# Altium PCB main.PcbDoc
Units mil, origin at the board's own origin, x right, y up, seen from the top; angles counter-clockwise.
Board outline 6000 x 4000 mil, 2 copper layers (Top Layer, Bottom Layer); 30 components, 40 nets, 196 pads, 9 vias.
Unrouted connection lines stored in the file: 23.
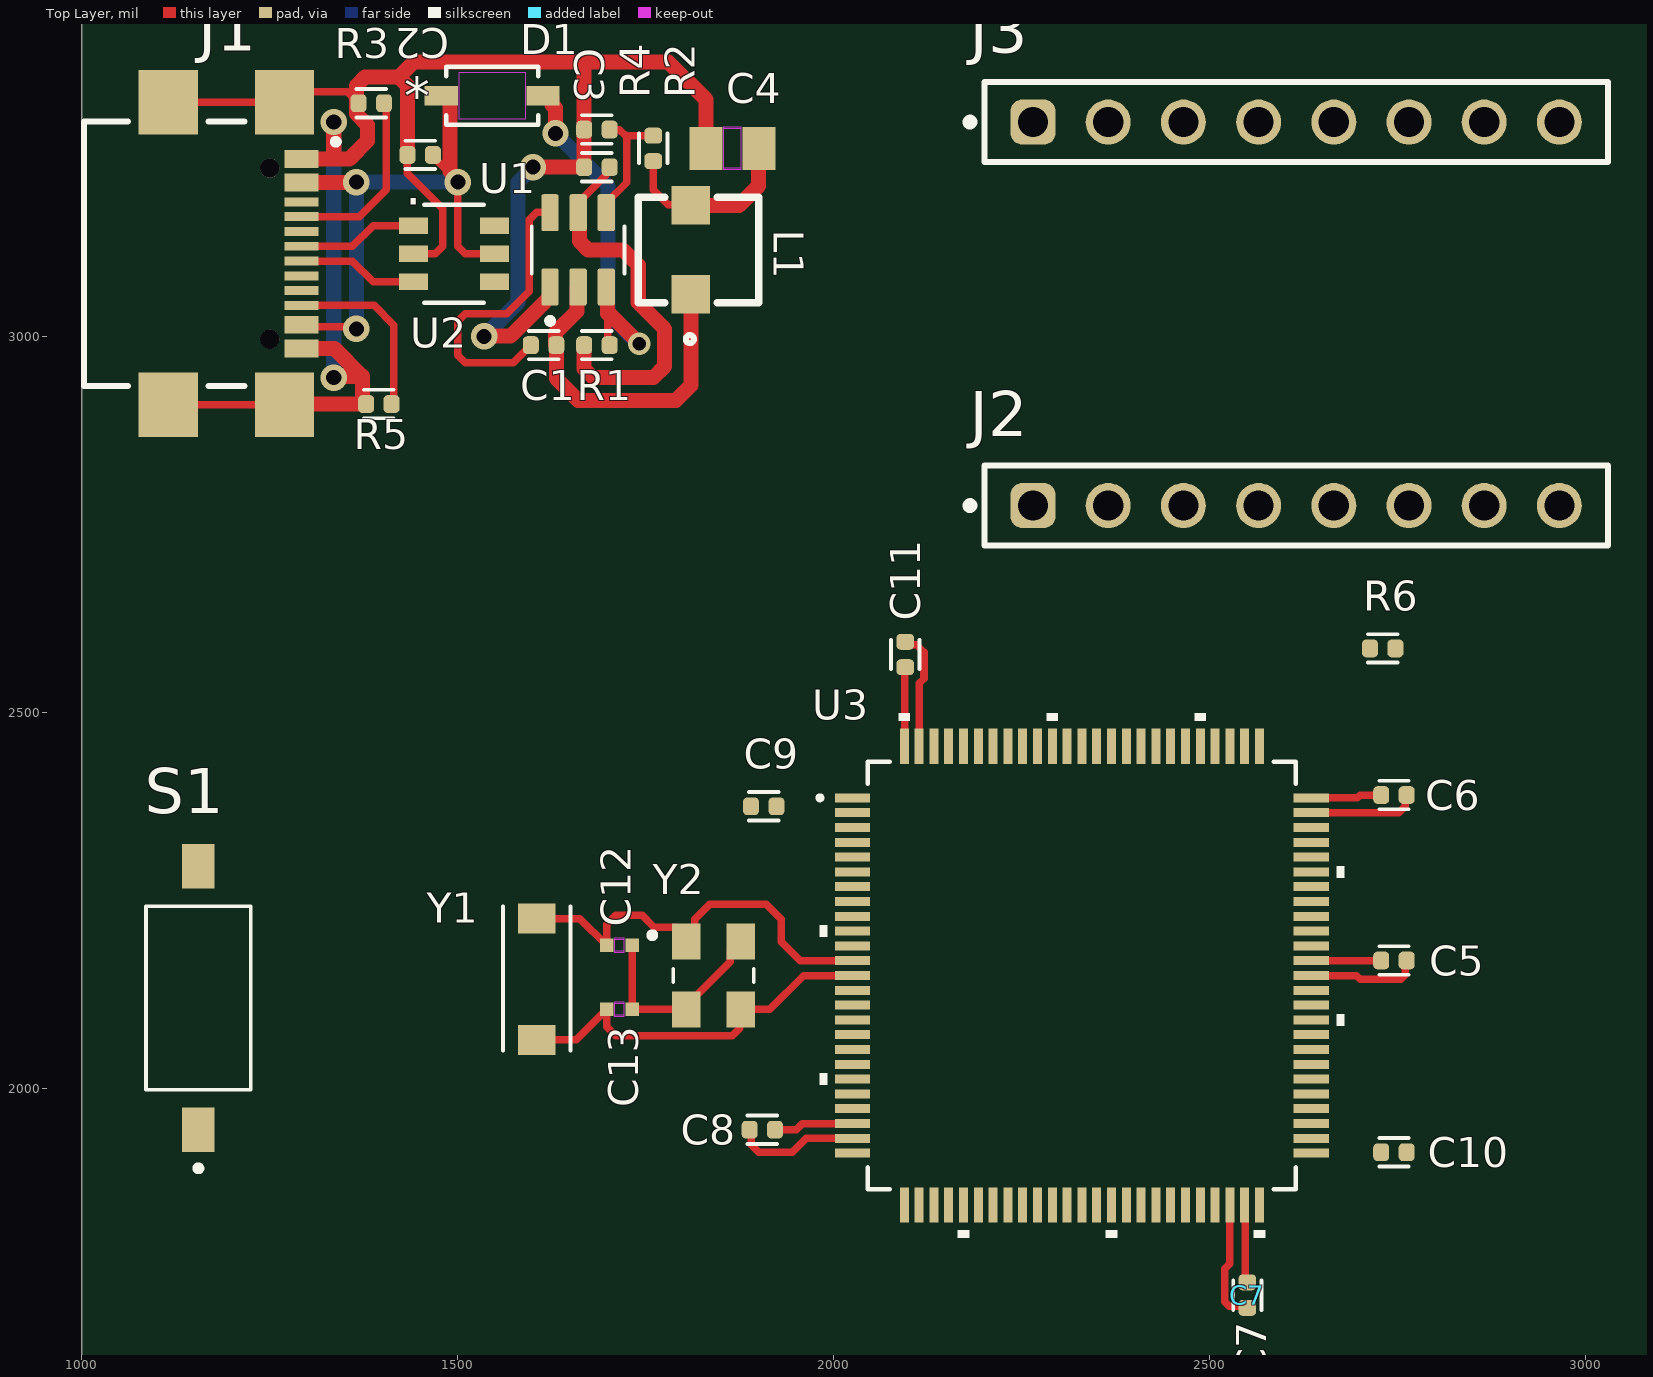
[diagram p0: Top Layer view]
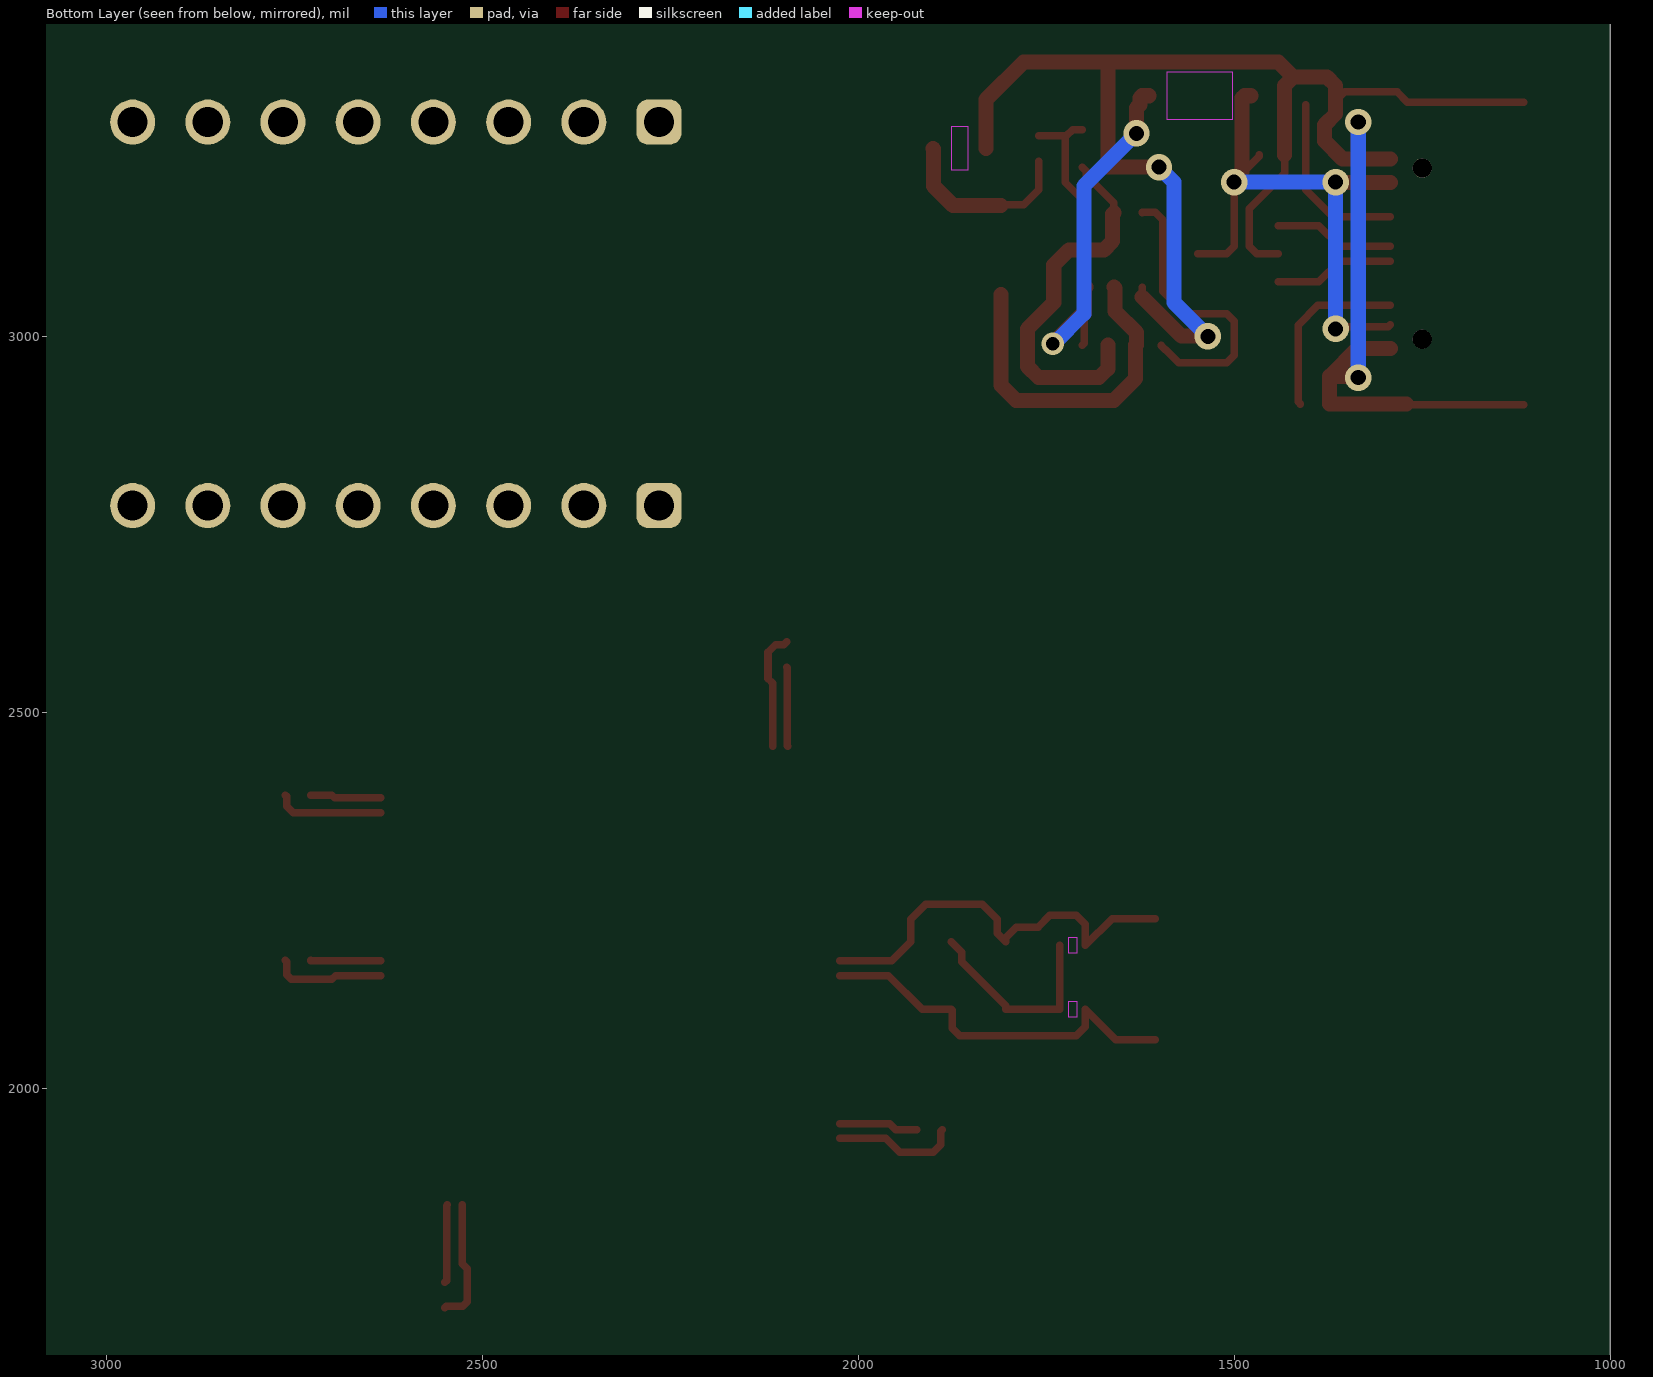
[diagram p1: Bottom Layer view, seen from below]
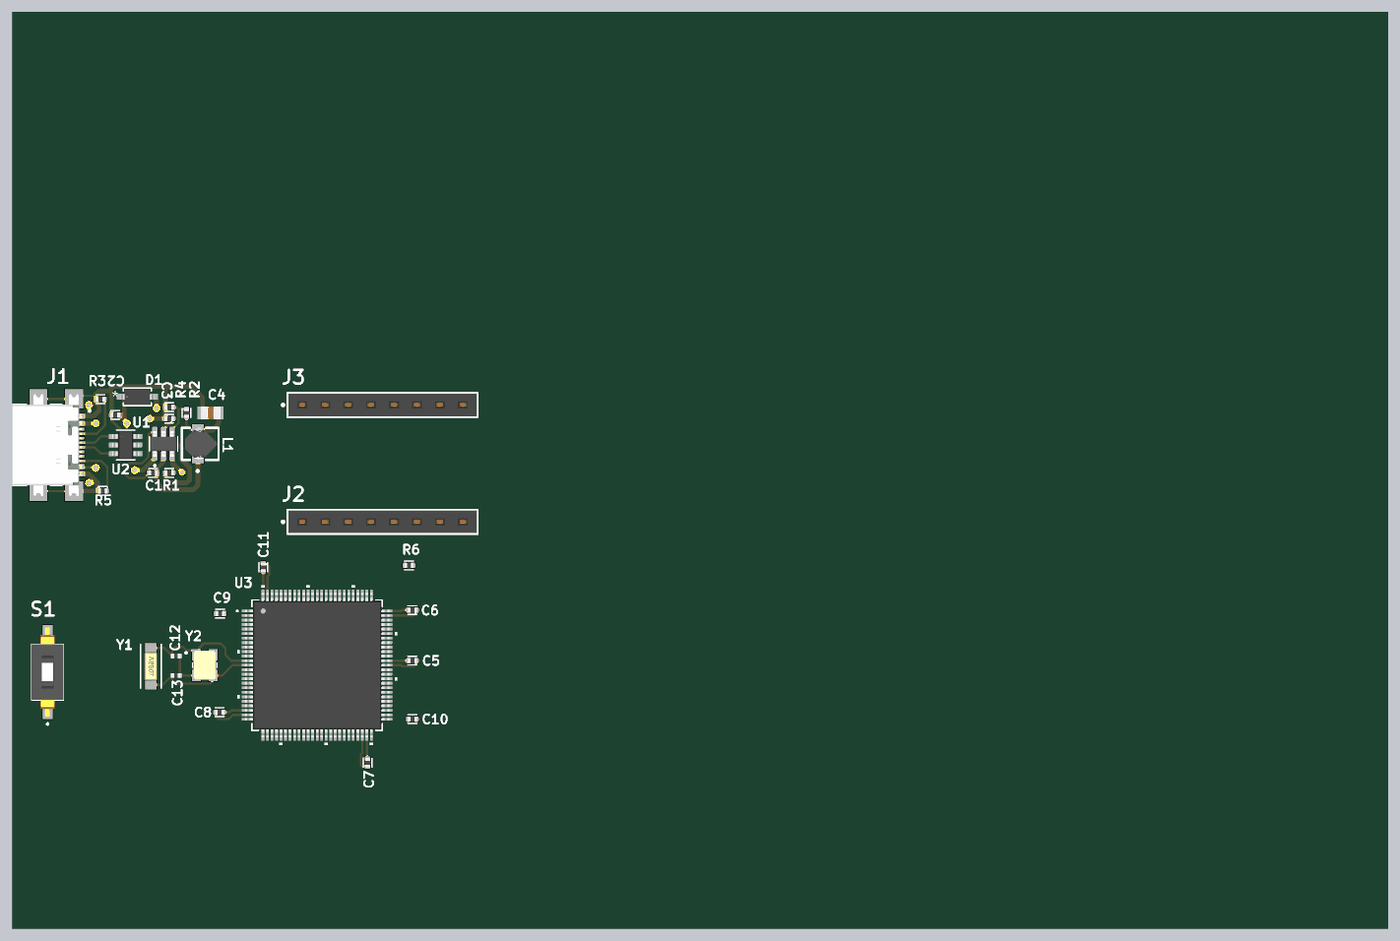
[diagram p2: 3D render of the assembled board from above, using the file's embedded part models]

## Layer stack, top to bottom
Top Solder: solder mask 0.4, Solder Resist, Dk 3.5
Top Layer: signal copper 1.4
Dielectric 1: dielectric 12.6, FR-4, Dk 4.8
Bottom Layer: signal copper 1.4
Bottom Solder: solder mask 0.4, Solder Resist, Dk 3.5

## Board outline
1000,1000 7000,1000 7000,5000 1000,5000

## Design rules (kind name [scope] priority, off if disabled: settings)
Clearance [All] p1: gap=2 ignorepadtopadclearanceinfootprint=FALSE except(0: Arc-Hole Track-Hole SMDPad-Hole THPad-Hole Via-Hole Fill-Hole Poly-Hole Region-Hole Text-Hole)
ComponentClearance [All] p1: gap=2 collisioncheckmode=3 verticalgap=2 showdistances=FALSE
DiffPairsRouting [All] p1: maxlimit=10 minlimit=10 mostfreqgap=10 toplayer_minwidth=15 toplayer_maxwidth=15 toplayer_prefwidth=15 bottomlayer_minwidth=15 bottomlayer_maxwidth=15 bottomlayer_prefwidth=15 maxuncoupledlength=500
PolygonConnect [All] p1: connectstyle=Relief reliefconductorwidth=10 reliefentries=4 polygonreliefangle="90 Angle" airgapwidth=10
RoutingVias [All] p1: holewidth=18 width=30 viastyle="Through Hole" minholewidth=8 minwidth=15 maxholewidth=28 maxwidth=50
SolderMaskExpansion [All] p1: expansion=4 istentingtop=FALSE
Width [All] p1: maxlimit=20 minlimit=1 preferedwidth=10 minimp=50.000000 maximp=50.000000 favimp=50.000000
28 further rules are at their usual default settings.

## Classes and differential pairs
differential pair USBD: +USBD_P -USBD_N

## Components (designator, comment, footprint, x,y, rotation, side; value= is the part's Value field where it differs from the comment)
C1 "104" CAPC1005X55N2 1614.09,2988.38 r180 top
C2 "104" CAPC1005X55N2 1450,3241.31 r0 top
C3 "104" CAPC1005X55N2 1685,3225 r180 top
C4 "22uF" CAP_CC0805_YAG 1865.31,3250 r0 top
C5 "104" CAPC1005X55N2 2745,2170 r0 top
C6 "104" CAPC1005X55N2 2745,2390 r0 top
C7 "104" CAPC1005X55N2 2550,1725 r270 top
C8 "104" CAPC1005X55N2 1905,1945 r0 top
C9 "104" CAPC1005X55N2 1906.93,2375 r0 top
C10 "104" CAPC1005X55N2 2745,1915 r0 top
C11 "104" CAPC1005X55N2 2095,2576.93 r90 top
C12 "15pF" CC0402N_YAG-L 1715,2190 r180 top
C13 "15pF" CC0402N_YAG-L 1715,2105 r180 top
D1 "1N5819" 1N5819HW-7-F_DIO 1545.75,3320 r0 top
J1 "USB-C" GCT_USB4110GFA 1250,3110 r270 top
J2 "HEADER_8_FEM" HEADER_8_FEM 2615,2775 r0 top
J3 "HEADER_8_FEM" HEADER_8_FEM 2615,3285 r0 top
L1 "2.2uH" CDRH2D14 1810,3115 r90 top
R1 "10K" RC0402 1685,2988.38 r0 top
R2 "15K" RC0402 1760,3250 r90 top
R3 "5K1" RC0402 1385,3310 r180 top
R4 "4K7" RC0402 1685,3275 r180 top
R5 "5K1" RC0402 1395,2910 r180 top
R6 "10k" RC0402 2730,2585 r0 top
S1 "SW" SW_DS04-254-2-01BK-SMT 1155,2120 r90 top
U1 "TPS563201DDCR" SOT95P280X110-6N 1660,3115 r90 top
U2 "USBLC6" SOT23-6L_STM 1495,3110 r0 top
U3 "STM32G474VET6TR" STM32G474VET6TR 2330,2150 r0 top
Y1 "16MHz" ABM3-16.000MHZ-D2Y-T 1605,2145 r270 top
Y2 "Xtal" OSCCC320X250X60N 1840,2150 r0 top

## Footprints (in the part's own frame and the unit in brackets; to place one, negate y for a bottom-side part, rotate by r counter-clockwise, add the part's x,y. Pads: shape width x height; smd on the part's side, far side on the other; paste and mask are expansions set on the pad)
1N5819HW-7-F_DIO [mil]
  rect 44x26 smd paste+0 mask+0: 1(-67.79,0) 2(67.79,0)
  Keep-Out Layer region: -43.79,-31.5 -43.79,31.5 43.79,31.5 43.79,-31.5
  silkscreen extent -61,-38 61,38, body extent -76,-34 76,34, height 53
ABM3-16.000MHZ-D2Y-T [mil]
  rect 40x50 smd: 1(-80.71,0) 2(80.71,0)
  silkscreen extent -97,-45 95,45, body extent -63,-30 63,30, height 35
CAP_CC0805_YAG [mil]
  rect 44x57 smd paste+0 mask+0: 1(-35.31,0) 2(35.31,0)
  Top Layer keep-out region: -11.31,-26.5 -11.31,26.5 11.31,26.5 11.31,-26.5
  Keep-Out Layer region: -11.31,-28.5 -11.31,28.5 11.31,28.5 11.31,-28.5
  body extent -43,-29 43,29, height 57
CAPC1005X55N2 [mm]
  rrect53% 0.54x0.6 smd: 1(-0.43,0) 2(0.43,0)
  silkscreen extent -0.5,-0.48 0.5,0.48, body extent -0.52,-0.28 0.52,0.28, height 0.56
CC0402N_YAG-L [mil]
  rect 18x18 smd paste+0 mask+0: 1(-17,0.03) 2(17,0.03)
  Top Layer keep-out region: -6,-7.97 -6,8.03 6,8.03 6,-7.97
  Keep-Out Layer region: -6,-9.97 -6,10.03 6,10.03 6,-9.97
  body extent -20,-10 20,10, height 28
CDRH2D14 [mil]
  rect 51.18x51.18 smd: 1(-59.06,0) 2(59.06,0)
  silkscreen extent -124,-90 70,70, body extent -70,-84 70,56, height 61
GCT_USB4110GFA [mm]
  rect 0.6x1.15 smd: A1/B12(-3.2,1.075) A4/B9(-2.4,1.075) B1/A12(3.2,1.075) B4/A9(2.4,1.075)
  rect 0.3x1.15 smd: A5(-1.25,1.075) A6(-0.25,1.075) A7(0.25,1.075) A8(1.25,1.075) B5(1.75,1.075) B6(0.75,1.075) B7(-0.75,1.075) B8(-1.75,1.075)
  rect 2.18x2 smd: S1(-5.11,0.5) S2(5.11,0.5) S3(-5.11,-3.43) S4(5.11,-3.43)
  round 0.65 hole 0.65 unplated: ""(-2.89,0) ""(2.89,0)
  silkscreen extent -4.47,-6.28 4.47,2.33, body extent -5.65,-6.28 5.65,1.42, height 3.26
HEADER_8_FEM [mm]
  rrect50% 1.52x1.52 hole 1.02: 1(-8.89,0)
  round 1.52 hole 1.02: 2(-6.35,0) 3(-3.81,0) 4(-1.27,0) 5(1.27,0) 6(3.81,0) 7(6.35,0) 8(8.89,0)
  silkscreen extent -11.14,-1.35 10.54,1.35, body extent -10.41,-1.25 10.41,1.25, height 8.55
OSCCC320X250X60N [mm]
  rect 0.97x1.22 smd: 1(-0.92,1.145) 2(-0.92,-1.145) 3(0.92,-1.145) 4(0.92,1.145)
  silkscreen extent -2.17,-0.22 1.36,1.46, body extent -1.25,-1.6 1.25,1.6, height 0.65
RC0402 [mm]
  rrect53% 0.54x0.6 smd: 1(-0.43,0) 2(0.43,0)
  silkscreen extent -0.5,-0.48 0.5,0.48, body extent -0.52,-0.28 0.52,0.28, height 0.56
SOT23-6L_STM [mil]
  rect 38.5x22 smd paste+0 mask+0: 1(-53.75,37.4) 2(-53.75,0) 3(-53.75,-37.4) 4(53.75,-37.4) 5(53.75,0) 6(53.75,37.4)
  silkscreen extent -40,-65 40,65, body extent -59,-60 59,60, height 57
SOT95P280X110-6N [mm]
  rrect25% 1.25x0.59 smd: 1(-1.255,0.95) 2(-1.255,0) 3(-1.255,-0.95) 4(1.255,-0.95) 5(1.255,0) 6(1.255,0.95)
  silkscreen extent -2.5,-1.57 0.8,1.57, body extent -1.4,-1.45 1.4,1.45, height 1.1
STM32G474VET6TR [mil]
  rect 47x12 smd paste+0 mask+0: 1(-305.12,236.22) 2(-305.12,216.54) 3(-305.12,196.85) 4(-305.12,177.17) 5(-305.12,157.48) 6(-305.12,137.8) 7(-305.12,118.11) 8(-305.12,98.43) 9(-305.12,78.74) 10(-305.12,59.06) 11(-305.12,39.37) 12(-305.12,19.69) 13(-305.12,0) 14(-305.12,-19.68) 15(-305.12,-39.37) 16(-305.12,-59.06) 17(-305.12,-78.74) 18(-305.12,-98.43) 19(-305.12,-118.11) 20(-305.12,-137.8) 21(-305.12,-157.48) 22(-305.12,-177.17) 23(-305.12,-196.85) 24(-305.12,-216.54) 25(-305.12,-236.22) 51(305.12,-236.22) 52(305.12,-216.54) 53(305.12,-196.85) 54(305.12,-177.17) 55(305.12,-157.48) 56(305.12,-137.8) 57(305.12,-118.11) 58(305.12,-98.43) 59(305.12,-78.74) 60(305.12,-59.06) 61(305.12,-39.37) 62(305.12,-19.68) 63(305.12,0) 64(305.12,19.68) 65(305.12,39.37) 66(305.12,59.06) 67(305.12,78.74) 68(305.12,98.43) 69(305.12,118.11) 70(305.12,137.8) 71(305.12,157.48) 72(305.12,177.17) 73(305.12,196.85) 74(305.12,216.54) 75(305.12,236.22)
  rect 12x47 smd paste+0 mask+0: 26(-236.22,-305.12) 27(-216.54,-305.12) 28(-196.85,-305.12) 29(-177.17,-305.12) 30(-157.48,-305.12) 31(-137.8,-305.12) 32(-118.11,-305.12) 33(-98.43,-305.12) 34(-78.74,-305.12) 35(-59.06,-305.12) 36(-39.37,-305.12) 37(-19.68,-305.12) 38(0,-305.12) 39(19.68,-305.12) 40(39.37,-305.12) 41(59.06,-305.12) 42(78.74,-305.12) 43(98.43,-305.12) 44(118.11,-305.12) 45(137.8,-305.12) 46(157.48,-305.12) 47(177.17,-305.12) 48(196.85,-305.12) 49(216.54,-305.12) 50(236.22,-305.12) 76(236.22,305.12) 77(216.54,305.12) 78(196.85,305.12) 79(177.17,305.12) 80(157.48,305.12) 81(137.8,305.12) 82(118.11,305.12) 83(98.43,305.12) 84(78.74,305.12) 85(59.06,305.12) 86(39.37,305.12) 87(19.68,305.12) 88(0,305.12) 89(-19.68,305.12) 90(-39.37,305.12) 91(-59.06,305.12) 92(-78.74,305.12) 93(-98.43,305.12) 94(-118.11,305.12) 95(-137.8,305.12) 96(-157.48,305.12) 97(-177.17,305.12) 98(-196.85,305.12) 99(-216.54,305.12) 100(-236.22,305.12)
  silkscreen extent -351,-349 349,349, body extent -315,-315 315,315, height 63
SW_DS04-254-2-01BK-SMT [mm]
  rect 1.5x1.1 smd: 1A(-4.45,0) 1B(4.45,0)
  silkscreen extent -5.85,-1.77 3.1,1.77, body extent -4.95,-1.76 4.95,1.78, height 3.98

## Part data
C1 C2 C3 C5 C6 C7 C8 C9 C10 C11: library part CC0402KRX7R7BB104, "Multilayer Ceramic Capacitor, 0.1 uF, 16 V, i¢¯¨ö 10%, X7R, 0402 [1005 Metric]", Capacitance=100nF, Case Code (Imperial)=0402, Case Code (Metric)=1005, Dielectric=X7R, LCSC=C60474, Manufacturer=Yageo, Max Operating Temperature=125¡ÆC, Min Operating Temperature=-55¡ÆC, Package Quantity=1, Supplier Part Number 1=311-1338-1-ND, Temperature Coefficient=30ppm/¡ÆC, Tolerance=10%, Voltage=16V, Case/Package=0402, Category="Ceramic Capacitors", ComponentLink1Description=https://datasheet.ciiva.com/11788/0900766b80ce67ed-11788364.pdf?src-supplier=Rs, ComponentLink1URL=https://datasheet.ciiva.com/11788/0900766b80ce67ed-11788364.pdf?src-supplier=Rs, ComponentLink2Description=https://datasheet.ciiva.com/7978/1489800-7978111.pdf?src-supplier=Element14, ComponentLink2URL=https://datasheet.ciiva.com/7978/1489800-7978111.pdf?src-supplier=Element14, ComponentLink3Description=https://datasheet.ciiva.com/161/mlccorderingcode-161545.pdf?src-supplier=Digikey, ComponentLink3URL=https://datasheet.ciiva.com/161/mlccorderingcode-161545.pdf?src-supplier=Digikey, ComponentLink4Description=https://datasheet.ciiva.com/161/mlccorderingcode-161544.pdf?src-supplier=Digikey, ComponentLink4URL=https://datasheet.ciiva.com/161/mlccorderingcode-161544.pdf?src-supplier=Digikey, ComponentLink5Description=https://datasheet.ciiva.com/161/mlccorderingcode-161546.pdf?src-supplier=Digikey, ComponentLink5URL=https://datasheet.ciiva.com/161/mlccorderingcode-161546.pdf?src-supplier=Digikey, ComponentLink6Description=https://datasheet.ciiva.com/8033/1734573-8033661.pdf?src-supplier=Element14, ComponentLink6URL=https://datasheet.ciiva.com/8033/1734573-8033661.pdf?src-supplier=Element14, ComponentLink7Description=https://datasheet.ciiva.com/11587/upy-gphc-x7r-6-3v-to-50v-8-11587305.pdf?src-supplier=Avnet, ComponentLink7URL=https://datasheet.ciiva.com/11587/upy-gphc-x7r-6-3v-to-50v-8-11587305.pdf?src-supplier=Avnet, Depth=0.5mm, Halogen Free=5694HalogenFree, Height=0.5mm, Lead Free=5697LeadFree, Length=1mm, Manufacturer Part Number=CC0402KRX7R7BB104, Material=4241ConductorMaterial, Mount="Surface Mount", Number of Pins=2, Packaging="Tape and Reel", Pricing 1="1=0.1, 10=0.024, 50=0.0164, 100=0.0139, 500=0.0098, 1000=0.00852, 2500=0.00718, 5000=0.00636 (USD)", Radiation Hardening=No, Reach SVHC Compliant=No, RoHS=Yes, RoHS Compliant=Yes, Series=CC, Stock 1=15609894, Supplier 1=Digikey, Termination=SMD/SMT, Thickness=0.022inch, Voltage Rating=16V, Voltage Rating (AC)=16V, Voltage Rating (DC)=16V, Width=0.02inch
C4: library part CC0805MKX5R6BB226, "Multilayer Ceramic Capacitor, 22 uF, 10 V, ¡¾ 20%, X5R, 0805 [2012 Metric]", LCSC=C109314, Manufacturer=Yageo, Supplier Part Number 1=311-1900-1-ND, Category="Ceramic Capacitors", ComponentLink1Description=https://datasheet.ciiva.com/26863/getdatasheetpartid-573628-26863004.pdf?src-supplier=Verical, ComponentLink1URL=https://datasheet.ciiva.com/26863/getdatasheetpartid-573628-26863004.pdf?src-supplier=Verical, Halogen Free=5694HalogenFree, Lead Free=5697LeadFree, Manufacturer Part Number=CC0805MKX5R6BB226, Pricing 1="1=0.39, 10=0.229, 50=0.1654, 100=0.1457, 500=0.11208, 1000=0.10161 (USD)", RoHS=Yes, Stock 1=418703, Supplier 1=Digikey
C12 C13: library part CC0402JRNPO9BN150, "Multilayer Ceramic Capacitor, 15 pF, 50 V, ¡¾ 5%, C0G (NP0), 0402 [1005 Metric]", Case Code (Imperial)=0402, Case Code (Metric)=1005, Dielectric=C0G, Dielectric Material=4241ConductorMaterial, Insulation Resistance=100GR, LCSC=C106997, Manufacturer=Yageo, Max Operating Temperature=125¡ÆC, Min Operating Temperature=-55¡ÆC, Package Quantity=1, Supplier Part Number 1=311-1017-1-ND, Temperature Coefficient=30ppm/¡ÆC, Tolerance=5%, Voltage=50V, Capacitance=15pF, Case/Package=0402, Category="Ceramic Capacitors", ComponentLink1Description=https://datasheet.ciiva.com/144/mlccorderingcode-144002.pdf?src-supplier=Digikey, ComponentLink1URL=https://datasheet.ciiva.com/144/mlccorderingcode-144002.pdf?src-supplier=Digikey, ComponentLink2Description=https://datasheet.ciiva.com/144/mlccorderingcode-144001.pdf?src-supplier=Digikey, ComponentLink2URL=https://datasheet.ciiva.com/144/mlccorderingcode-144001.pdf?src-supplier=Digikey, ComponentLink3Description=https://datasheet.ciiva.com/144/mlccorderingcode-144003.pdf?src-supplier=Digikey, ComponentLink3URL=https://datasheet.ciiva.com/144/mlccorderingcode-144003.pdf?src-supplier=Digikey, ComponentLink4Description=https://datasheet.ciiva.com/13386/upy-gp-np0-16v-to-50v-8-13386330.pdf?src-supplier=Mouser, ComponentLink4URL=https://datasheet.ciiva.com/13386/upy-gp-np0-16v-to-50v-8-13386330.pdf?src-supplier=Mouser, ComponentLink5Description=https://datasheet.ciiva.com/11587/upy-gp-np0-16v-to-50v-8-11587085.pdf?src-supplier=Avnet, ComponentLink5URL=https://datasheet.ciiva.com/11587/upy-gp-np0-16v-to-50v-8-11587085.pdf?src-supplier=Avnet, Depth=0.5mm, Halogen Free=5694HalogenFree, Height=0.5mm, Lead Free=5697LeadFree, Length=1mm, Manufacturer Part Number=CC0402JRNPO9BN150, Mount="Surface Mount", Number of Pins=2, Packaging="Tape and Reel", Pricing 1="1=0.1, 10=0.023, 50=0.0152, 100=0.0129, 500=0.00904, 1000=0.00785, 2500=0.0066, 5000=0.00584 (USD)", Radiation Hardening=No, Reach SVHC Compliant=No, RoHS=Yes, RoHS Compliant=Yes, Series=CC, Stock 1=476708, Supplier 1=Digikey, Termination=SMD/SMT, Thickness=0.022inch, Voltage Rating=50V, Voltage Rating (AC)=50V, Voltage Rating (DC)=50V, Width=0.02inch
D1: library part 1N5819HW-7-F, "1N5819HW Series 40 V 1 A Surface Mount Schottky Barrier Rectifier - SOD-123", Average Rectified Current=1A, Capacitance=50pF, Case/Package=SOD-123-2, Forward Voltage=450mV, LCSC=C82544, Manufacturer=Diodes, Max Forward Surge Current (Ifsm)=25A, Max Operating Temperature=125¡ÆC, Max Power Dissipation=450mW, Max Repetitive Reverse Voltage (Vrrm)=40V, Max Reverse Current=50uA, Min Operating Temperature=-65¡ÆC, Package Quantity=3000, Supplier Part Number 1=1N5819HW-FDICT-ND, Category="Rectifier Diodes", ComponentLink1Description=https://datasheet.ciiva.com/912/ds30217-912801.pdf?src-supplier=Digikey, ComponentLink1URL=https://datasheet.ciiva.com/912/ds30217-912801.pdf?src-supplier=Digikey, ComponentLink2Description=https://datasheet.ciiva.com/912/ds30217-912802.pdf?src-supplier=Digikey, ComponentLink2URL=https://datasheet.ciiva.com/912/ds30217-912802.pdf?src-supplier=Digikey, ComponentLink3Description=https://datasheet.ciiva.com/912/ds30217-912803.pdf?src-supplier=Digikey, ComponentLink3URL=https://datasheet.ciiva.com/912/ds30217-912803.pdf?src-supplier=Digikey, ComponentLink4Description=https://datasheet.ciiva.com/8303/ds30217-8303132.pdf?src-supplier=Avnet, ComponentLink4URL=https://datasheet.ciiva.com/8303/ds30217-8303132.pdf?src-supplier=Avnet, ComponentLink5Description=https://datasheet.ciiva.com/1177/ds30217-1177089.pdf?src-supplier=Element14, ComponentLink5URL=https://datasheet.ciiva.com/1177/ds30217-1177089.pdf?src-supplier=Element14, Current Rating=1A, Forward Current=1A, Height=1.25mm, Lead Free="Lead Free", Length=2.85mm, Manufacturer Part Number=1N5819HW-7-F, Max Reverse Voltage (DC)=40V, Number of Pins=2, Output Current=1A, Packaging="Tape and Reel", Peak Non-Repetitive Surge Current=25A, Polarity=Standard, Pricing 1="1=0.25, 10=0.17, 100=0.1143, 500=0.08782, 1000=0.07897 (USD)", Radiation Hardening=No, Reach SVHC Compliant=No, Reverse Voltage=40V, RoHS=Yes, RoHS Compliant=Yes, Series=-, Stock 1=70594, Supplier 1=Digikey, Termination=SMD/SMT, Voltage Rating (DC)=40V, Weight=0.000353oz, Width=1.7mm
J1: library part USB4110-GF-A, "USB Connector, 16 Contact(s), Male, Right Angle, Surface Mount Terminal, Locking, Receptacle", Manufacturer="Global Connector Technology", Supplier Part Number 1=2073-USB4110-GF-A-1-ND, Voltage Rating=20V, Category="USB Connectors", ComponentLink1Description=https://gct.co/files/drawings/usb4110.pdf?src-supplier=Digikey, ComponentLink1URL=https://gct.co/files/drawings/usb4110.pdf?src-supplier=Digikey, Contact Material=153,157ConductorMaterial, Height=3.46mm, LCSC=USB4110-GF-A, Manufacturer Part Number=USB4110-GF-A, Number of Contacts=16NUMBER, Number of Pins=16NUMBER, Orientation=5496OrientationType, Pricing 1="1=1.64, 10=1.244, 25=1.1176, 50=1.032, 100=0.9547, 250=0.86368, 500=0.80254 (USD)", RoHS=No, Stock 1=30215, Supplier 1=Digikey, USB Standard=6108USBStandard
J2 J3: "Btb Conn, Rcpt, 8Pos, 1Row, 2.54Mm Rohs Compliant: Yes", Contact Resistance=20mR, Current Rating=3A, LCSC=C27438, Manufacturer="Wurth Electronics", Manufacturer Part Number=61300811821, Operating Supply Voltage=250V, Supplier Part Number 1=732-61300811821-ND, Category=LDO, Gender=30Gender, Lead Pitch=2.54mm, Number of Pins=8NUMBER, Orientation=5495OrientationType, Pricing 1="1=0.41, 10=0.39, 100=0.375, 250=0.359, 500=0.345 (USD)", RoHS=Yes, Stock 1=3282, Supplier 1=Digikey
L1: library part CDRH2D14NP-2R2NC, "2.2¥ìH Shielded  Inductor 1.6A 94 mOhm Max Nonstandard", LCSC=C167267, Manufacturer=Sumida, Supplier Part Number 1=308-2294-1-ND, Category="Fixed Inductors", ComponentLink1Description=http://www.mouser.com/ds/2/390/CDRH2D14-523410.pdf?src-supplier=Mouser, ComponentLink1URL=http://www.mouser.com/ds/2/390/CDRH2D14-523410.pdf?src-supplier=Mouser, ComponentLink2Description=http://www.sumida.com/products/pdf/CDRH2D14.pdf?src-supplier=Avnet, ComponentLink2URL=http://www.sumida.com/products/pdf/CDRH2D14.pdf?src-supplier=Avnet, ComponentLink3Description=http://www.sumida.com/products/pdf/CDRH2D14.pdf?src-supplier=Digikey, ComponentLink3URL=http://www.sumida.com/products/pdf/CDRH2D14.pdf?src-supplier=Digikey, ComponentLink4Description=http://products.sumida.com/products/pdf/CDRH2D14.pdf?src-supplier=Digikey, ComponentLink4URL=http://products.sumida.com/products/pdf/CDRH2D14.pdf?src-supplier=Digikey, ComponentLink5Description=http://www.sumida.com/products/pdf/CDRH2D14,2D14BLD.pdf?src-supplier=Future+Electronics, ComponentLink5URL=http://www.sumida.com/products/pdf/CDRH2D14,2D14BLD.pdf?src-supplier=Future+Electronics, ComponentLink6Description=https://datasheet.octopart.com/CDRH2D14NP-2R2NC-Sumida-datasheet-13694704.pdf?src-supplier=Future+Electronics, ComponentLink6URL=https://datasheet.octopart.com/CDRH2D14NP-2R2NC-Sumida-datasheet-13694704.pdf?src-supplier=Future+Electronics, ComponentLink7Description=https://datasheet.octopart.com/CDRH2D14NP-2R2NC-Sumida-datasheet-81411419.pdf?src-supplier=LKR, ComponentLink7URL=https://datasheet.octopart.com/CDRH2D14NP-2R2NC-Sumida-datasheet-81411419.pdf?src-supplier=LKR, Manufacturer Part Number=CDRH2D14NP-2R2NC, Pricing 1="1=1, 10=0.776, 25=0.7016, 50=0.65, 100=0.6022, 250=0.5442, 500=0.50392 (USD)", RoHS=Yes, Stock 1=95645, Supplier 1=Digikey
R1 R6: library part RC0402FR-0710KL, "SMD Chip Resistor, 10 kOhm, i¢¯¨ö 1%, 62.5 mW, 0402 [1005 Metric], Thick Film, General Purpose", Case Code (Imperial)=0402, Case Code (Metric)=1005, LCSC=C60490, Manufacturer=Yageo, Max Operating Temperature=155¡ÆC, Max Power Dissipation=63mW, Min Operating Temperature=-55¡ÆC, Power Rating=62.5mW, Resistance=10kR, Resistance Tolerance=1%, Resistor Type="Thick Film", Supplier Part Number 1=311-10.0KLRCT-ND, Temperature Coefficient=100ppm/¡ÆC, Voltage Rating=50V, Case/Package=0402, Category="Chip SMD Resistors", ComponentLink1Description=https://datasheet.ciiva.com/7660/38568-7660787.pdf?src-supplier=Element14, ComponentLink1URL=https://datasheet.ciiva.com/7660/38568-7660787.pdf?src-supplier=Element14, ComponentLink2Description=https://datasheet.ciiva.com/7849/1686128-7849814.pdf?src-supplier=Element14, ComponentLink2URL=https://datasheet.ciiva.com/7849/1686128-7849814.pdf?src-supplier=Element14, ComponentLink3Description=https://datasheet.ciiva.com/7983/1018594-7983486.pdf?src-supplier=Element14, ComponentLink3URL=https://datasheet.ciiva.com/7983/1018594-7983486.pdf?src-supplier=Element14, ComponentLink4Description=https://datasheet.ciiva.com/22747/1018594-22747512.pdf?src-supplier=Element14, ComponentLink4URL=https://datasheet.ciiva.com/22747/1018594-22747512.pdf?src-supplier=Element14, ComponentLink5Description=https://datasheet.ciiva.com/12667/pyu-rc0402-51-rohs-l-6-r-12667067.pdf?src-supplier=Mouser, ComponentLink5URL=https://datasheet.ciiva.com/12667/pyu-rc0402-51-rohs-l-6-r-12667067.pdf?src-supplier=Mouser, ComponentLink6Description=https://datasheet.ciiva.com/7849/1784430-7849813.pdf?src-supplier=Element14, ComponentLink6URL=https://datasheet.ciiva.com/7849/1784430-7849813.pdf?src-supplier=Element14, ComponentLink7Description=https://datasheet.ciiva.com/7849/1784430-7849815.pdf?src-supplier=Element14, ComponentLink7URL=https://datasheet.ciiva.com/7849/1784430-7849815.pdf?src-supplier=Element14, Construction=Rectangular, Depth=0.5mm, Features="Moisture Resistant", Lead Free=5697LeadFree, Lead Pitch=0.2mm, Length=1mm, Manufacturer Part Number=RC0402FR-0710KL, Military Standard=Not, Number of Pins=2, Number of Terminations=2, Packaging="Tape and Reel", Pricing 1="1=0.1, 10=0.009, 50=0.0072, 100=0.0051, 500=0.00408, 5000=0.00306 (USD)", Reach SVHC Compliant=Unknown, RoHS=Yes, RoHS Compliant=Yes, Series=RC, Stock 1=7390601, Supplier 1=Digikey, Termination=SMD/SMT, Tolerance=1%, Voltage Rating (DC)=50V, Width=0.5mm
R2: library part RT0402BRD0715KL, "Res Thin Film 0402 15K Ohm 0.1% 0.063W(1/16W) ¡¾25ppm/C Pad SMD T/R", LCSC=C852545, Manufacturer=Yageo, Supplier Part Number 1=YAG2302CT-ND, Category="Chip SMD Resistors", ComponentLink1Description=https://datasheet.ciiva.com/12723/pyu-rt-1-to-0-05-rohs-l-4-12723782.pdf?src-supplier=Mouser, ComponentLink1URL=https://datasheet.ciiva.com/12723/pyu-rt-1-to-0-05-rohs-l-4-12723782.pdf?src-supplier=Mouser, ComponentLink2Description=https://datasheet.ciiva.com/2582/pyu-rt-1-to-0-05-rohs-l-5-2582151.pdf?src-supplier=Digikey, ComponentLink2URL=https://datasheet.ciiva.com/2582/pyu-rt-1-to-0-05-rohs-l-5-2582151.pdf?src-supplier=Digikey, Manufacturer Part Number=RT0402BRD0715KL, Pricing 1="1=0.17, 10=0.119, 50=0.097, 100=0.0867, 500=0.0663, 1000=0.05814, 5000=0.04386 (USD)", RoHS=Yes, Stock 1=59202, Supplier 1=Digikey
R3 R5: library part RC0402FR-075K1L, "SMD Chip Resistor, 5.1 kOhm, i¢¯¨ö 1%, 62.5 mW, 0402 [1005 Metric], Thick Film, General Purpose", Case Code (Imperial)=0402, Case Code (Metric)=1005, LCSC=C105872, Manufacturer=Yageo, Max Operating Temperature=155¡ÆC, Max Power Dissipation=63mW, Min Operating Temperature=-55¡ÆC, Package Quantity=1, Resistance=5.1kR, Resistance Tolerance=1%, Resistor Type="Thick Film", Supplier Part Number 1=311-5.10KLRCT-ND, Temperature Coefficient=100ppm/¡ÆC, Voltage Rating=50V, Case/Package=0402, Category="Chip SMD Resistors", Construction=Rectangular, Depth=0.5mm, Features="Moisture Resistant", Height=0.016inch, Lead Free=5697LeadFree, Length=1mm, Manufacturer Part Number=RC0402FR-075K1L, Military Standard=Not, Number of Terminations=2, Packaging="Tape and Reel", Power Rating=63mW, Pricing 1="1=0.1, 10=0.009, 50=0.0072, 100=0.0041, 500=0.00306 (USD)", Reach SVHC Compliant=Unknown, RoHS=Yes, RoHS Compliant=Yes, Series=RC, Stock 1=868211, Supplier 1=Digikey, Technology="THICK FILM", Termination=SMD/SMT, Tolerance=1%, Voltage Rating (DC)=50V, Width=0.02inch, Working Voltage=50V
R4: library part RC0402JR-074K7L, "SMD Chip Resistor, 4.7 kOhm, i¢¯¨ö 5%, 62.5 mW, 0402 [1005 Metric], Thick Film, General Purpose", Case Code (Imperial)=0402, Case Code (Metric)=1005, Manufacturer=Yageo, Max Operating Temperature=155¡ÆC, Max Power Dissipation=63mW, Min Operating Temperature=-55¡ÆC, Package Quantity=1, Power Rating=62.5mW, Resistance=4.7kR, Resistance Tolerance=5%, Resistor Type="Thick Film", Supplier Part Number 1=311-4.7KJRCT-ND, Temperature Coefficient=100ppm/¡ÆC, Voltage Rating=50V, Case/Package=0402, Category="Chip SMD Resistors", ComponentLink1Description=https://datasheet.ciiva.com/2452/pyu-r-int-thick-7-2452611.pdf?src-supplier=Digikey, ComponentLink1URL=https://datasheet.ciiva.com/2452/pyu-r-int-thick-7-2452611.pdf?src-supplier=Digikey, ComponentLink2Description=https://datasheet.ciiva.com/2452/pyu-r-int-thick-7-2452612.pdf?src-supplier=Digikey, ComponentLink2URL=https://datasheet.ciiva.com/2452/pyu-r-int-thick-7-2452612.pdf?src-supplier=Digikey, ComponentLink3Description=https://datasheet.ciiva.com/2452/pyu-r-int-thick-7-2452613.pdf?src-supplier=Digikey, ComponentLink3URL=https://datasheet.ciiva.com/2452/pyu-r-int-thick-7-2452613.pdf?src-supplier=Digikey, ComponentLink4Description=https://datasheet.ciiva.com/16800/pyu-rc0402-51-rohs-l-6-r-16800266.pdf?src-supplier=Future+Electronics, ComponentLink4URL=https://datasheet.ciiva.com/16800/pyu-rc0402-51-rohs-l-6-r-16800266.pdf?src-supplier=Future+Electronics, ComponentLink5Description=https://datasheet.ciiva.com/46412/1018594-46412841.pdf?src-supplier=Element14, ComponentLink5URL=https://datasheet.ciiva.com/46412/1018594-46412841.pdf?src-supplier=Element14, ComponentLink6Description=https://datasheet.ciiva.com/7850/1018594-7850222.pdf?src-supplier=Element14, ComponentLink6URL=https://datasheet.ciiva.com/7850/1018594-7850222.pdf?src-supplier=Element14, ComponentLink7Description=https://datasheet.ciiva.com/7850/1018594-7850223.pdf?src-supplier=Element14, ComponentLink7URL=https://datasheet.ciiva.com/7850/1018594-7850223.pdf?src-supplier=Element14, Features="Moisture Resistant", Height=0.016inch, Lead Free="Lead Free", Length=0.039inch, Manufacturer Part Number=RC0402JR-074K7L, Number of Terminations=2, Packaging="Tape and Reel", Pricing 1="1=0.1, 10=0.008, 50=0.0062, 100=0.0041, 500=0.00356, 1000=0.00306 (USD)", Reach SVHC Compliant=No, RoHS=Yes, RoHS Compliant=Yes, Series=RC, Size Code=0402, Stock 1=17920115, Supplier 1=Digikey, Termination=SMD/SMT, Tolerance=5%, Voltage Rating (AC)=50V, Width=0.02inch
S1: library part DS04-254-2-01BK-SMT, "Switch DIP OFF ON SPST 1 Flat Slide 0.025A 24VDC Gull Wing 2.54mm SMD Tube", LCSC=C5439760, Manufacturer="CUI Devices", Max Operating Temperature=85¡ÆC, Min Operating Temperature=-40¡ÆC, Supplier Part Number 1=2223-DS04-254-2-01BK-SMT-ND, Switching Current=25mA, Switching Voltage=24V, Actuator Type="Slide (Standard)", Body Material=PBT,Polybutylene, Category="DIP Switches", ComponentLink1Description=https://www.cuidevices.com/product/resource/digikeypdf/ds04-254-smt.pdf?src-supplier=Digikey, ComponentLink1URL=https://www.cuidevices.com/product/resource/digikeypdf/ds04-254-smt.pdf?src-supplier=Digikey, ComponentLink2Description=https://datasheet.octopart.com/DS04-254-2-01BK-SMT-CUI-Devices-datasheet-175928987.pdf?src-supplier=Future+Electronics, ComponentLink2URL=https://datasheet.octopart.com/DS04-254-2-01BK-SMT-CUI-Devices-datasheet-175928987.pdf?src-supplier=Future+Electronics, ComponentLink3Description=https://datasheet.octopart.com/DS04-254-2-01BK-SMT-CUI-Devices-datasheet-154834557.pdf?src-supplier=Electro+Sonic, ComponentLink3URL=https://datasheet.octopart.com/DS04-254-2-01BK-SMT-CUI-Devices-datasheet-154834557.pdf?src-supplier=Electro+Sonic, Contact Material="Copper Alloy", Contact Plating=Gold, Electrical Life=2000Cycles, Height=3.66mm, Length=3.54mm, Manufacturer Part Number=DS04-254-2-01BK-SMT, Mount="Surface Mount", Number of Positions=1, Pitch=2.54mm, Pricing 1="1=0.79, 10=0.643, 25=0.592, 120=0.513, 360=0.46325, 600=0.44157, 1080=0.41768, 2520=0.38509, 5040=0.35998 (USD)", RoHS=Yes, Series=DS04-254-SMT, Stock 1=6629, Supplier 1=Digikey, Termination="Gull Wing", Throw Configuration=SPST, Voltage Rating (DC)=24V, Washable=No, Width=6.2mm
U1: "Conv DC-DC 4.5V to 17V Synchronous Step Down Single-Out 0.76V to 7V 3A 6-Pin TSOT-23 T/R", LCSC=C116592, Manufacturer="Texas Instruments", Supplier Part Number 1=296-47238-1-ND, Category="Voltage Regulators - Switching", ComponentLink1Description=http://www.ti.com/general/docs/suppproductinfo.tsp?distId=10&amp;gotoUrl=http%3A%2F%2Fwww.ti.com%2Flit%2Fgpn%2Ftps563201&src-supplier=Digikey, ComponentLink1URL=http://www.ti.com/general/docs/suppproductinfo.tsp?distId=10&amp;gotoUrl=http%3A%2F%2Fwww.ti.com%2Flit%2Fgpn%2Ftps563201&src-supplier=Digikey, ComponentLink2Description=http://www.ti.com/lit/ds/symlink/tps563201.pdf?src-supplier=Digikey, ComponentLink2URL=http://www.ti.com/lit/ds/symlink/tps563201.pdf?src-supplier=Digikey, ComponentLink3Description=http://www.ti.com/lit/gpn/tps563201?src-supplier=Mouser, ComponentLink3URL=http://www.ti.com/lit/gpn/tps563201?src-supplier=Mouser, Height=1.1mm, Length=2.9mm, Manufacturer Part Number=TPS563201DDCR, Number of Channels=1NUMBER, Pricing 1="1=0.38, 10=0.261, 25=0.2324, 100=0.2008, 250=0.18568, 500=0.17656, 1000=0.16907 (USD)", RoHS=Yes, Stock 1=3511, Supplier 1=Digikey, Thickness=870um, Width=1.6mm
U2: library part USBLC6-2SC6, "ESD Suppressor Diode Array Dual Uni-Dir 15kV Air Gap/15kV Contact Disc 6-Pin SOT-23 T/R", Breakdown Voltage=6V, Capacitance=3.5pF, Case/Package=SOT-23, Clamping Voltage=17V, LCSC=C5250994, Leakage Current=150nA, Manufacturer=STMicroelectronics, Max Operating Temperature=125¡ÆC, Max Repetitive Reverse Voltage (Vrrm)=5.25V, Min Operating Temperature=-40¡ÆC, Operating Supply Voltage=1.1V, Package Quantity=3000, Peak Pulse Current=5A, Power Line Protection=Yes, Supplier Part Number 1=497-5235-1-ND, Test Current=1mA, Working Voltage=5V, Category="TVS Diodes", Clamping Voltage-Max=17V, ComponentLink1Description=https://datasheet.ciiva.com/1268/1690354-1268384.pdf?src-supplier=Element14, ComponentLink1URL=https://datasheet.ciiva.com/1268/1690354-1268384.pdf?src-supplier=Element14, ComponentLink2Description=https://datasheet.ciiva.com/4508/cd00050750-113117-4508433.pdf?src-supplier=Mouser, ComponentLink2URL=https://datasheet.ciiva.com/4508/cd00050750-113117-4508433.pdf?src-supplier=Mouser, ComponentLink3Description=https://datasheet.ciiva.com/41444/001184109-da-01-en-ic-esd-protecti-usblc6-2sc6-sot-23-6-stm-41444156.pdf?src-supplier=Conrad, ComponentLink3URL=https://datasheet.ciiva.com/41444/001184109-da-01-en-ic-esd-protecti-usblc6-2sc6-sot-23-6-stm-41444156.pdf?src-supplier=Conrad, Data Rate=480Mbps, Depth=1.75mm, Direction=Unidirectional,Bidirectional, ESD Protection=Yes, Height=1.3mm, Lead Free="Lead Free", Length=3.05mm, Manufacturer Part Number=USBLC6-2SC6, Max Breakdown Voltage=6V, Max Reverse Leakage Current=150nA, Min Breakdown Voltage=6V, Mount="Surface Mount", Number of Bidirectional Channels=2, Number of Channels=2, Number of Elements=1, Number of Pins=6, Packaging="Tape and Reel", Polarity=Unidirectional,Bidirectional, Pricing 1="1=0.36, 10=0.243, 100=0.163, 500=0.127, 1000=0.114, 3000=0.09, 6000=0.084, 9000=0.078, 15000=0.077, 21000=0.0755, 30000=0.075 (USD)", Radiation Hardening=No, Reach SVHC Compliant=No, Reverse Breakdown Voltage=6V, Reverse Standoff Voltage=5.25V, RoHS=Yes, RoHS Compliant=Yes, Series=USB, Stock 1=85420, Supplier 1=Digikey, Termination=SMD/SMT, Width=1.75mm
U3: library part STM32G474VET6, "MCU 32-Bit ARM Cortex-M4F RISC 512KB Flash 1.71V to 3.6V 100-Pin LQFP Tray", Frequency=170MHz, LCSC=C431632, Manufacturer=STMicroelectronics, Max Operating Temperature=85¡ÆC, Max Supply Voltage=3.6V, Min Operating Temperature=-40¡ÆC, Min Supply Voltage=1.62V, Supplier Part Number 1=497-19476-ND, Category=Microcontrollers, ComponentLink1Description=http://www.farnell.com/datasheets/2818776.pdf?src-supplier=Farnell, ComponentLink1URL=http://www.farnell.com/datasheets/2818776.pdf?src-supplier=Farnell, ComponentLink2Description=https://www.st.com/resource/en/datasheet/stm32g474ve.pdf?src-supplier=Digikey, ComponentLink2URL=https://www.st.com/resource/en/datasheet/stm32g474ve.pdf?src-supplier=Digikey, ComponentLink3Description=https://datasheet.octopart.com/STM32G474VET6-STMicroelectronics-datasheet-136696182.pdf?src-supplier=LKR, ComponentLink3URL=https://datasheet.octopart.com/STM32G474VET6-STMicroelectronics-datasheet-136696182.pdf?src-supplier=LKR, Core Architecture=6081CoreArchitecture, Density=512KB, Height=1.6mm, Manufacturer Part Number=STM32G474VET6, Number of A/D Converters=5NUMBER, Number of Channels=42NUMBER, Number of D/A Converters=3NUMBER, Number of I2C Channels=4NUMBER, Number of I/Os=86NUMBER, Number of SPI Channels=4NUMBER, Number of Timers/Counters=2NUMBER, Number of UART Channels=2NUMBER, Pricing 1="1=9.21, 10=7.164, 25=6.6528, 90=6.12656, 270=5.80396, 450=5.68469, 990=5.53108 (USD)", RAM Size=128KB, RoHS=Yes, Stock 1=1871, Supplier 1=Digikey
Y1: library part ABM3-16.000MHZ-D2Y-T, "Crystal 16MHz ¡¾20ppm (Tol) ¡¾30ppm (Stability) 18pF FUND 40Ohm 2-Pin Mini-CSMD T/R", LCSC=C596861, Manufacturer=Abracon, Supplier Part Number 1=535-10638-1-ND, Category=Crystals, ComponentLink1Description=https://datasheet.ciiva.com/28508/1754353-28508494.pdf?src-supplier=Element14, ComponentLink1URL=https://datasheet.ciiva.com/28508/1754353-28508494.pdf?src-supplier=Element14, ComponentLink2Description=https://datasheet.ciiva.com/4945/abm3-47699-4945397.pdf?src-supplier=Mouser, ComponentLink2URL=https://datasheet.ciiva.com/4945/abm3-47699-4945397.pdf?src-supplier=Mouser, ComponentLink3Description=https://datasheet.ciiva.com/855/abm3-855934.pdf?src-supplier=Digikey, ComponentLink3URL=https://datasheet.ciiva.com/855/abm3-855934.pdf?src-supplier=Digikey, ComponentLink4Description=https://datasheet.ciiva.com/855/abm3-855935.pdf?src-supplier=Digikey, ComponentLink4URL=https://datasheet.ciiva.com/855/abm3-855935.pdf?src-supplier=Digikey, ComponentLink5Description=https://datasheet.ciiva.com/855/abm3-855936.pdf?src-supplier=Digikey, ComponentLink5URL=https://datasheet.ciiva.com/855/abm3-855936.pdf?src-supplier=Digikey, ComponentLink6Description=https://datasheet.ciiva.com/7998/abm3-7998565.pdf?src-supplier=Element14, ComponentLink6URL=https://datasheet.ciiva.com/7998/abm3-7998565.pdf?src-supplier=Element14, Manufacturer Part Number=ABM3-16.000MHZ-D2Y-T, Pricing 1="1=0.56, 10=0.491, 50=0.445, 100=0.4266, 500=0.38674 (USD)", RoHS=Yes, Stock 1=43168, Supplier 1=Digikey
Y2: library part CX3225SB16000D0GZJC1, "Crystal 16.0000MHZ 8PF SMD", Case/Package=SMD/SMT, ESR (Equivalent Series Resistance)=80R, Frequency=16MHz, Frequency Stability=15ppm, LCSC=C13738, Load Capacitance=8pF, Manufacturer="Kyocera AVX", Max Operating Temperature=85¡ÆC, Min Operating Temperature=-25¡ÆC, Ratings=AEC-Q200, Supplier Part Number 1=478-CX3225SB16000D0GZJC1CT-ND, Category=Crystals, ComponentLink1Description=https://media.digikey.com/pdf/Data%20Sheets/AVX%20PDFs/CX3225SB16000D0GZJC1_Spec.pdf?src-supplier=Digikey, ComponentLink1URL=https://media.digikey.com/pdf/Data%20Sheets/AVX%20PDFs/CX3225SB16000D0GZJC1_Spec.pdf?src-supplier=Digikey, Frequency Tolerance=15ppm, Height=0.024inch, Length=0.126inch, Manufacturer Part Number=CX3225SB16000D0GZJC1, Mount="Surface Mount", Packaging="Cut Tape", Pricing 1="1=0.59, 10=0.511, 50=0.4606, 100=0.4404, 500=0.39722, 1000=0.38002 (USD)", RoHS=Yes, Stock 1=104939, Supplier 1=Digikey, Width=0.098inch

## Via types
v1: diameter 35, hole 20, Top Layer to Bottom Layer, 8 vias
v2: diameter 30, hole 18, Top Layer to Bottom Layer, 1 vias

## Nets (pads, with @x,y where several pads share a name; then routed paths per layer and width w, separated by ;. In a path a pad name is that pad's centre, name@x,y a point inside that pad or via, vN(x,y) a via of type N, cw(c..) or ccw(c..) an arc to the next point about the centre after c; other vN are vias at no path point)
DIR1: J3.1
GND: C2.1 C3.2 C4.1 C5.2 C6.2 C7.2 C8.2 C9.2 C10.2 C11.2 C12.1 C13.1 J1.A1/B12 J1.B1/A12 J1.S1 J1.S2 J1.S3 J1.S4 R3.2 R4.2 R5.2 S1.1A U1.1 U2.2 U3.23 U3.48 U3.63 U3.74 U3.99 Y2.2 Y2.4 | length 3696.9
  Top Layer w10: J1.S4 J1.S2 J1.S2@1270.87,2910 ; J1.S3 J1.S1 1283.5,3325 1353.07,3325 1361.65,3316.42 1362.49,3316.42 R3.2@1365,3313.91 ; v1(1335,2945) v1@1336.93,2946.93 ; C2.1 1433.07,3216.93 1480,3170 1480,3120 1470,3110 U2.2 ; v1(1535,3000) v1@1535.38,3000.38 ; U1.1@1622.6,3052.6 U1.1 ; C12.1 C13.1 1803.73,2104.97 Y2.2 1803.78,2109.84 1862.13,2168.19 1862.13,2180.98 Y2.4 ; C8.2 1950,1945 1958.15,1953.15 U3.23 ; C11.2 2098.86,2590 2110,2590 2120,2580 2120,2545 2113.46,2538.46 U3.99 ; U3.48 2526.85,1766.85 2520,1760 2520,1715.86 2525.86,1710 2548.07,1710 C7.2 ; U3.63 2695,2150 2700,2145 2754.14,2145 2760,2150.86 2760,2168.07 C5.2 ; U3.74 2751.54,2366.54 2760,2375 2760,2388.07 C6.2
  Top Layer w20: J1.S2@1270.87,2910 1373.07,2910 1373.07,2946.93 ; J1.B1/A12 1335.98,2984.02 1373.07,2946.93 ; J1.A1/B12 1335,3235.98 ; v1(1335,3285) 1335,3235.98 ; v1@1336.93,2946.93 1373.07,2946.93 ; C2.1 1433.07,3333.28 1421.36,3345 ; v1@1535.38,3000.38 1570.38,3000.38 U1.1@1622.6,3052.6 ; v1(1600,3225) C3.2 R4.2 1668.07,3361.93 1665,3365 ; C4.1 1830,3315 1780,3365 1665,3365 ; 1335,3235.98 1355.98,3235.98 1380,3260 1380,3281.07 1365,3296.07 1365,3313.91 1365,3333.28 1376.72,3345 1421.36,3345 ; 1421.36,3345 1441.36,3365 1665,3365
  Bottom Layer w20: v1(1335,2945) v1(1335,3285) ; v1(1535,3000) 1580,3045 1580,3205 v1(1600,3225)
GND_IO1: J2.1
MGND1: J2.7
MS1_1: J3.7
MS2_1: J3.6
NetC1_1: C1.1 L1.1 U1.2 | length 454.2
  Top Layer w20: C1.1@1630,2988.38 1630,3005 1658.39,3033.39 1658.39,3063.98 U1.2 ; C1.1 1631.02,2943.98 1660,2915 1790,2915 1810,2935 L1.1
NetC1_2: C1.2 U1.6 | length 395
  Top Layer w10: C1.2 1597.16,2987.55 1591.58,2981.96 1590.74,2981.96 1573.78,2965 1510,2965 1500,2975 1500,3020 1510,3030 1565,3030 1595,3060 1595,3155 1605,3165 1622.01,3165 U1.6
NetC3_1: C3.1 R1.1 U1.5 | length 506.9
  Top Layer w10: U1.5 1660,3177.4 1696.69,3214.09 1696.69,3219.76 C3.1
  Top Layer w20: U1.5 1661.61,3162.8 1661.61,3126.72 1673.33,3115 1720,3115 1740,3095 1740,3045 1775,3010 1775,2960 1760,2945 1680,2945 1668.07,2956.93 R1.1
NetC12_2: C12.2 U3.12 Y1.1 Y2.1 | length 565.4
  Top Layer w10: Y1.1 1662.26,2225.71 C12.2 1698,2218 1710,2230 1745,2230 1760.91,2214.09 1789.68,2214.09 1803.78,2200 Y2.1 1815,2206.3 1815,2225 1835,2245 1910,2245 1930,2225 1930,2195 1955.31,2169.69 U3.12
NetC13_2: C13.2 U3.13 Y1.2 Y2.3 | length 511.7
  Top Layer w10: Y1.2 1657.32,2064.29 C13.2 1698,2082 1710,2070 1865,2070 1875,2080 1875,2103.7 Y2.3 1914.92,2104.92 1960,2150 U3.13
NetJ1_A5: J1.A5 R3.1 | length 240.6
  Top Layer w10: J1.A5 1369.21,3159.21 1405,3195 R3.1@1405,3308.06
NetJ1_A6: J1.A6 J1.B6 U2.1 | length 160.3
  Top Layer w10: J1.A6 1359.84,3119.84 1387.4,3147.4 U2.1
NetJ1_A7: J1.A7 J1.B7 U2.3 | length 160.3
  Top Layer w10: J1.A7 1359.84,3100.16 1387.4,3072.6 U2.3
NetJ1_B5: J1.B5 R5.1 | length 239.7
  Top Layer w10: J1.B5 1388.9,3041.1 1415,3015 1415,2913.06 R5.1@1411.99,2910.05
NetR2_2: R2.2 R4.1 U1.4 | length 176.2
  Top Layer w10: U1.4 1697.4,3177.4 1725,3205 1725,3265 1723.07,3266.93 ; R4.1 1715,3275 1723.07,3266.93 ; R2.2 1723.07,3266.93
NetR6_1: R6.1 S1.1B U3.95
OA1_1: J2.5
OA2_1: J2.6
OB1_1: J2.4
OB2_1: J2.3
PDN_UART_A1: J3.4
PDN_UART_B1: J3.5
SPI1_MISO: U3.28
SPI1_MOSI: U3.29
SPI1_NSS: U3.26
SPI1_SCK: U3.27
SPI4_MISO: U3.4
SPI4_MOSI: U3.5
SPI4_SCK: U3.1
STEP1: J3.2
TMC_CLK1: J3.3
TMC_EN2: J3.8
USBD_N: U2.4 U3.72
USBD_P: U2.6 U3.73
VBUS: C2.2 D1.1 J1.A4/B9 J1.B4/A9 U2.5 | length 783.1
  Top Layer w10: J1.B4/A9 1295.08,3012.76 1362.24,3012.76 v1(1365,3010) ; v1@1363.76,3204.49 ccw(c1363.76,3206.24) v1(1365,3205) ; C2.2 1466.93,3239.78 v1@1500,3206.71 ; v1(1500,3205) 1500,3120 1510,3110 U2.5
  Top Layer w20: J1.A4/B9 v1@1363.76,3204.49 ; D1.1 1486.56,3320 1489.56,3317 1489.56,3219.5 1500,3209.06 1500,3206.71 v1(1500,3205)
  Bottom Layer w20: v1(1365,3010) v1(1365,3205) v1@1490,3205
VDD_3V3: C4.2 C5.1 C6.1 C7.1 C8.1 C9.1 C10.1 C11.1 L1.2 R2.1 R6.2 U3.24 U3.49 U3.64 U3.75 U3.100 | length 812.6
  Top Layer w10: R2.1 1760,3195 1780,3175 1809.06,3175 L1.2 ; C8.1 1890,1943.07 1890,1925 1900,1915 1945,1915 1963.46,1933.46 U3.24 ; U3.100 2094.39,2455.73 2094.39,2559.39 C11.1 ; U3.49 2547.54,1843.88 2547.54,1744.39 C7.1 ; U3.64 2635.28,2169.84 2727.91,2169.84 C5.1 ; U3.75 2696.22,2386.22 2700,2390 C6.1
  Top Layer w20: L1.2 1874.06,3174.06 1900,3200 1900,3249.39 C4.2
VIN: D1.2 R1.2 U1.3 | length 527.4
  Top Layer w10: 1699.67,3030 1699.67,2990.65 R1.2
  Top Layer w20: D1.2 1622.54,3320 1625.54,3317 1625.54,3308 1630,3303.54 v1(1630,3270) ; U1.3 1699.02,3063.98 1699.02,3030.65 ; 1699.67,3030 1699.02,3030.65 ; v2(1741.43,2990.43) 1701.22,3030.65 1699.02,3030.65
  Bottom Layer w20: v1(1630,3270) 1700,3200 1700,3030 1740,2990 1741,2990 v2(1741.43,2990.43)
VIO1: J2.2
VM1: J2.8
pads on no net: J1. J1.A8 J1.B8 U3.2 U3.3 U3.6 U3.7 U3.8 U3.9 U3.10 U3.11 U3.14 U3.15 U3.16 U3.17 U3.18 U3.19 U3.20 U3.21 U3.22 U3.25 U3.30 U3.31 U3.32 U3.33 U3.34 U3.35 U3.36 U3.37 U3.38 U3.39 U3.40 U3.41 U3.42 U3.43 U3.44 U3.45 U3.46 U3.47 U3.50 U3.51 U3.52 U3.53 U3.54 U3.55 U3.56 U3.57 U3.58 U3.59 U3.60 U3.61 U3.62 U3.65 U3.66 U3.67 U3.68 U3.69 U3.70 U3.71 U3.76 U3.77 U3.78 U3.79 U3.80 U3.81 U3.82 U3.83 U3.84 U3.85 U3.86 U3.87 U3.88 U3.89 U3.90 U3.91 U3.92 U3.93 U3.94 U3.96 U3.97 U3.98

## Text inside footprints (layer, text, board x,y; h text height)
D1: Top Overlay "*" at 1428.47,3295 h50; Mechanical 13 "*" at 1487.25,3295 h50
U2: Mechanical 13 "*" at 1463,3117 h50